# EAGLE board schema_puissance (EAGLE 6.5.0)
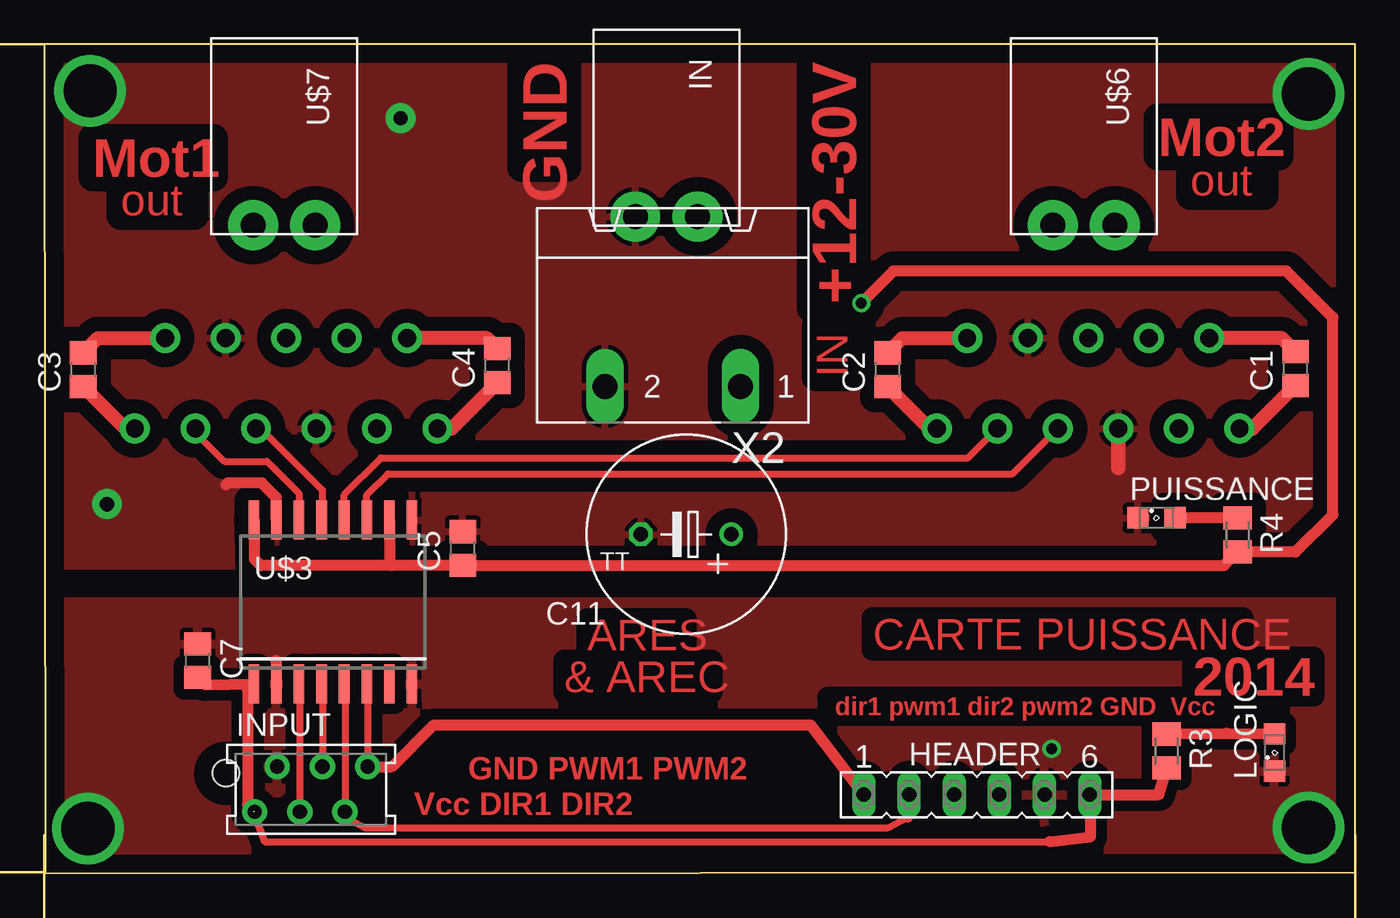
[diagram p0: board, top side]
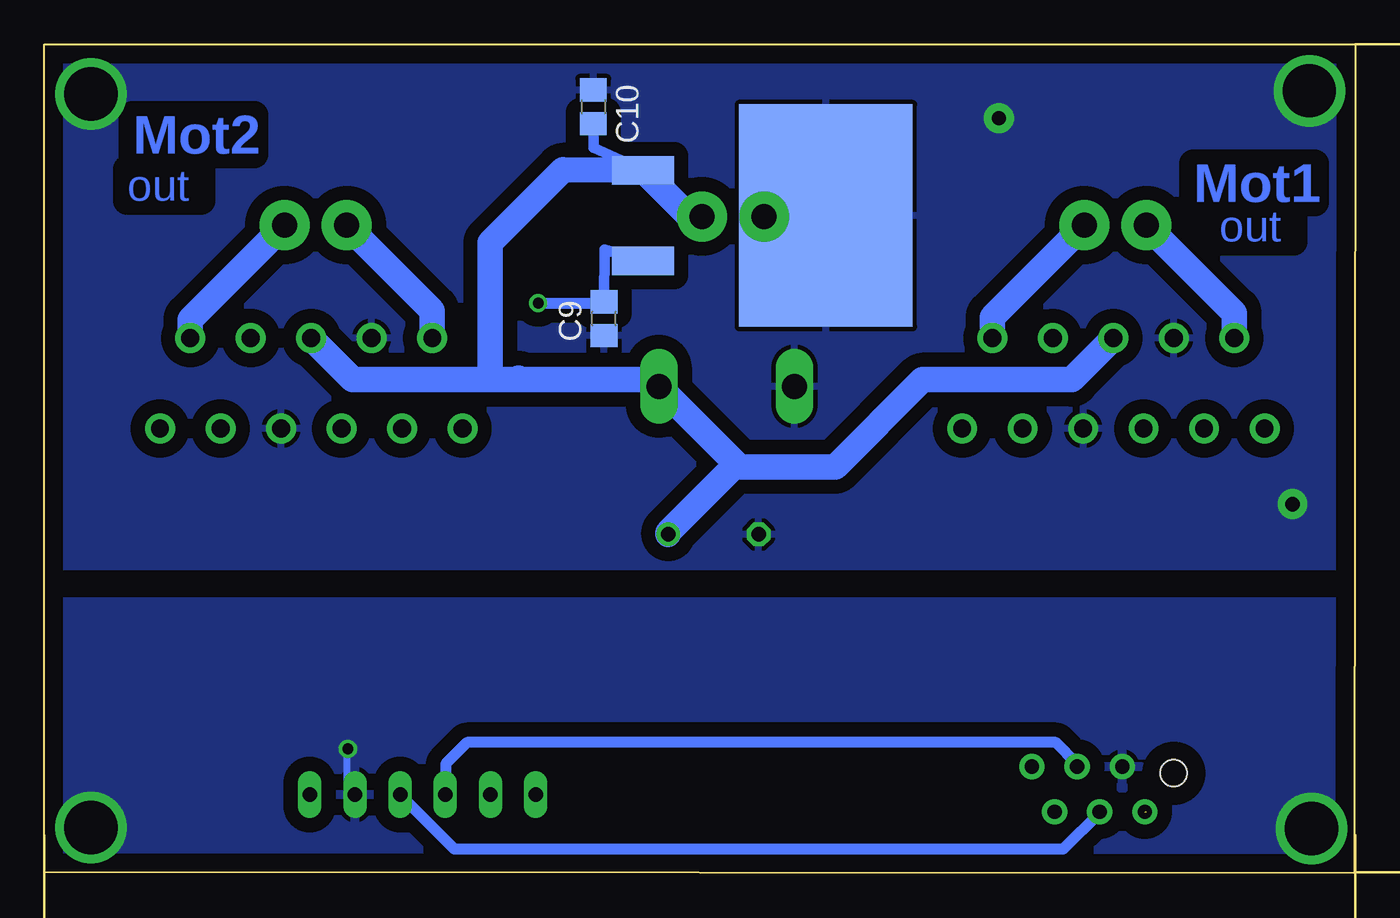
[diagram p1: board, bottom side, seen from below]

Size 73.66 x 46.58 mm. Coordinates in mm from the lower left corner, seen from the top.
Outline: 0,46.58 0.03,0 73.66,0.03 73.66,46.58 0,46.58
Copper layers (1*16): Top 0.035mm / dielectric 1.5mm / Bottom 0.035mm
Design rules "default": minimum track width 10mil, minimum drill 24mil, track to track 8mil, track to pad 8mil, pad to pad 8mil, via to via 8mil, smd to smd 8mil, copper to edge 40mil, drill to drill 8mil, minimum pad ring 10mil, minimum via ring 8mil, stop-mask expansion 4mil, vias tented up to drill 0mil, thermal gap 10mil
Milling: area 0,-5.6 to 1.5,-5; area 72.2,-5.6 to 73.7,-5; area 33.4,-4.9 to 40.3,-3.1; area -14.3,0 to -13.7,1.5; area -14.3,45.1 to -13.7,46.6; area -16.1,19.8 to -14.4,26.8; 6 lines

## Footprints (pad centres in the part's own frame; a part is rotated, then mirrored left to right if it is on the bottom)
C0805 = smd 1.3 x 1.5: 1 -0.95,0; 2 0.95,0
TT5D11 = drill 0.813: + -2.54,0 | drill 0.813 octagon: - 2.54,0
FE06 = drill 0.813 long: 1 -6.35,0; 2 -3.81,0; 3 -1.27,0; 4 1.27,0; 5 3.81,0; 6 6.35,0
SL-3.5-2-90G = drill 1.4 pad 2.8: 1 0,-1.75; 2 0,1.75
AMP-215079-6 = drill 0.8 pad 1.422: 1 0,0; 2 1.27,2.54; 3 2.54,0; 4 3.81,2.54; 5 5.08,0; 6 6.35,2.54 | hole 1.5: -1.62,2.175
SML0805 = smd 1.2 x 1.2: A 1.05,0; C -1.05,0
M0805 = smd 1.3 x 1.6: 1 -0.95,0; 2 0.95,0
LMD18200 = drill 1 pad 1.676: 1 0,0; 2 1.7,5.08; 3 3.4,0; 4 5.1,5.08; 5 6.8,0; 6 8.5,5.08; 7 10.2,0; 8 11.9,5.08; 9 13.6,0; 10 15.3,5.08; 11 17,0
SO-16W = smd 0.6 x 2.2: 1 -4.445,-4.6; 2 -3.175,-4.6; 3 -1.905,-4.6; 4 -0.635,-4.6; 5 0.635,-4.6; 6 1.905,-4.6; 7 3.175,-4.6; 8 4.445,-4.6; 9 4.445,4.6; 10 3.175,4.6; 11 1.905,4.6; 12 0.635,4.6; 13 -0.635,4.6; 14 -1.905,4.6; 15 -3.175,4.6; 16 -4.445,4.6
DPAK = smd 12.5 x 9.75: 1 0,0 | smd 1.6 x 3.5: 2 -2.54,-10.275; 3 2.54,-10.275
GMSTBA2 = drill 1.397 long: 1 -3.81,5.08; 2 3.81,5.08

## Placement (x,y rotation side)
C1  10nF  [C0805]  70.31,28.36 90 top
C2  10nF  [C0805]  47.39,28.3 90 top
C3  10nF  [C0805]  2.18,28.3 90 top
C4  10nF  [C0805]  25.46,28.53 90 top
C5  100nF  [C0805]  23.51,18.24 90 top
C7  100nF  [C0805]  8.61,11.94 270 top
C9  100nF  [C0805]  42.21,31.16 90 bottom
C10  330nF  [C0805]  42.81,43.07 270 bottom
C11  2200u  [TT5D11]  36.06,19.04 180 top
HEADER  [FE06]  52.4,4.4 0 top
IN  SL-3.5-2-90G  [SL-3.5-2-90G]  34.96,36.91 270 top
INPUT  MMATCH-6-  [AMP-215079-6]  11.81,3.44 0 top
LOGIC  [SML0805]  69.13,6.78 90 top
PUISSANCE  [SML0805]  62.5,19.97 0 top
R3  1k  [M0805]  63.08,6.86 270 top
R4  1k  [M0805]  67.06,19.01 270 top
U$1  LMD18200  [LMD18200]  5.08,24.99 0 top
U$2  LMD18200  [LMD18200]  50.16,24.99 0 top
U$3  ADUM1400S  [SO-16W]  16.21,15.24 0 top
U$5  L7805TO263  [DPAK]  29.74,36.97 270 bottom
U$6  SL-3.5-2-90G  [SL-3.5-2-90G]  58.42,36.42 270 top
U$7  SL-3.5-2-90G  [SL-3.5-2-90G]  13.47,36.42 270 top
X2  GMSTBA2  [GMSTBA2]  35.31,32.44 180 top

## Library data of the parts
C1-C5 C7 C9-C11 R3 R4 = rcl
HEADER = con-lsta; OC_FARNELL: unknown; OC_NEWARK: unknown
IN U$6 U$7 = WEIDMULLER
INPUT = jt-con-micromatch
LOGIC PUISSANCE = led
U$1 U$2 = texas
U$3 = analog-devices
U$5 = st-microelectronics
X2 = con-phoenix-762; MF: FARNELL; MPN: 1757242; OC_FARNELL: 3705171; OC_NEWARK: 71C4161

## Nets
+5V: C5.1 C9.2 R4.2 U$3.10 U$3.16 U$5.3
+12V: C10.2 C11.+ IN.2 U$1.6 U$2.6 U$5.2 X2.1
C_DIR1: HEADER.4 INPUT.3 U$3.3
C_DIR2: HEADER.2 INPUT.5 U$3.5
C_PWM1: HEADER.3 INPUT.4 U$3.4
C_PWM2: HEADER.1 INPUT.6 U$3.6
DIR1: U$1.3 U$3.14
DIR2: U$2.3 U$3.12
GND: C7.1 HEADER.5 INPUT.2 LOGIC.C U$3.2 U$3.8
GNDA: C5.2 C9.1 C10.1 C11.- IN.1 PUISSANCE.C U$1.4 U$1.7 U$2.4 U$2.7 U$3.9 U$3.15 U$5.1 X2.2
N$1: C1.1 U$2.11
N$2: PUISSANCE.A R4.1
N$3: C2.1 U$2.1
N$4: LOGIC.A R3.1
N$5: C3.1 U$1.1
N$7: C4.1 U$1.11
POLE_1_MOT1: C3.2 U$1.2 U$7.1
POLE_1_MOT2: C2.2 U$2.2 U$6.1
POLE_2_MOT1: C4.2 U$1.10 U$7.2
POLE_2_MOT2: C1.2 U$2.10 U$6.2
PWM1: U$1.5 U$3.13
PWM2: U$2.5 U$3.11
TF1: U$1.9
TF2: U$2.9
VCC: C7.2 HEADER.6 INPUT.1 R3.2 U$3.1

## Tracks (layer width: path | path; a pad name or v marks a point on that pad's centre or on a via)
+5V  (via drill 0.6 pad 1.02)
  Top 0.61: v45.91,32.04 47.71,33.84 69.81,33.84 72.41,31.24 72.41,20.14 70.31,18.04 67.08,18.04 R4.2 66.29,17.29 C5.1 19.51,17.29 | 19.51,17.29 12.16,17.29 11.81,17.64 11.81,19.8 U$3.16 | U$3.10 19.38,17.42 19.51,17.29
  Bottom 0.6: C9.2 42.18,35.04 U$5.3
  Bottom 0.61: v45.91,32.04 42.28,32.04 C9.2
+12V
  Bottom 0.6: C10.2 42.81,40.79 U$5.2
  Bottom 1.422: U$1.6 15.91,27.74 24.31,27.74 29.21,22.84 34.6,22.84 34.76,23 | U$2.6 56.33,27.74 48.51,27.74 | 48.51,27.74 47.11,27.74 | 47.11,27.74 39.5,27.74 X2.1 34.76,23 | C11.+ 38.6,19.15 34.76,23 | 47.01,27.84 47.11,27.74 | 48.51,27.74 48.61,27.84 48.61,35.44 44.52,39.54 U$5.2 37.49,36.98 arc-45 37.31,36.91 IN.2
C_DIR1
  Top 0.406: U$3.3 14.35,10.64 INPUT.3
  Bottom 0.61: INPUT.3 14.35,3.4 16.41,1.34 50.61,1.34 HEADER.4
C_DIR2
  Top 0.406: U$3.5 16.89,10.64 INPUT.5 | 16.89,3.16 18.01,2.55 47.41,2.55 48.51,3.14
  Top 0.61: INPUT.5 16.89,3.16 | 48.51,3.14 48.51,4.32 HEADER.2
C_PWM1
  Top 0.406: U$3.4 15.62,10.64 INPUT.4
  Bottom 0.61: INPUT.4 15.62,6.15 16.81,7.34 49.91,7.34 51.11,6.14 51.11,4.42 HEADER.3
C_PWM2
  Top 0.406: U$3.6 18.16,10.64 INPUT.6
  Top 0.61: INPUT.6 19.54,5.98 21.87,8.32 43.06,8.33 HEADER.1
DIR1
  Top 0.406: U$1.3 8.48,24.77 10.11,23.14 12.51,23.14 14.31,21.34 U$3.14
DIR2
  Top 0.406: U$3.12 16.84,21.28 18.91,23.34 51.91,23.34 U$2.3
GND  (via drill 0.6 pad 1.02, 3 pad 1.42)
  Top 0.61: 13.01,11.94 13.01,10.67 U$3.2
  Bottom 0.406: HEADER.5 56.65,4.4 56.65,6.81 | 56.65,6.98 56.69,6.98 56.69,6.81 56.65,6.81 | 56.65,6.81 56.65,6.98 | 56.65,6.98 56.65,7
  other vias: 56.61,6.98 71.05,2.57 2.44,2.51
  pour Bottom (isolate 0.813): 0.01,-0.06 0.11,15.24 73.61,15.24 73.51,-0.06
  pour Top (isolate 0.61): 0.11,15.24 -0.2,-0.29 73.61,-0.06 73.61,15.24
GNDA  (via drill 0.8 pad 1.68, 3 pad 1.42)
  Top 0.61: U$3.15 13.04,21.12 12.21,21.94 10.31,21.94 10.21,21.84
  Top 0.813: U$2.7 60.36,22.78
  other vias: 3.51,20.74 20.01,42.44 2.57,43.98 71.05,43.8
  pour Bottom (isolate 0.8): 0.11,17.24 0.11,46.24 73.61,46.51 73.61,17.24
  pour Top (isolate 0.8): 0.11,17.24 0.11,46.24 73.61,46.24 73.61,17.24
N$1
  Top 0.8: C1.1 67.89,24.99 U$2.11
N$2
  Top 0.61: R4.1 PUISSANCE.A
N$3
  Top 0.8: C2.1 49.74,24.99 U$2.1
N$4
  Top 0.61: R3.1 66.43,7.87 LOGIC.A
N$5
  Top 0.8: C3.1 4.54,24.99 U$1.1
N$7
  Top 0.8: C4.1 22.87,24.99 U$1.11
POLE_1_MOT1
  Top 0.8: C3.2 3,30.07 U$1.2
  Bottom 1.422: U$7.1 6.78,31.48 U$1.2
POLE_1_MOT2
  Top 0.8: C2.2 48.21,30.07 U$2.2
  Bottom 1.422: U$6.1 51.87,31.62 U$2.2
POLE_2_MOT1
  Top 0.8: C4.2 24.87,30.07 U$1.10
  Bottom 1.422: U$7.2 20.38,31.26 U$1.10
POLE_2_MOT2
  Top 0.8: C1.2 69.55,30.07 U$2.10
  Bottom 1.422: U$6.2 65.47,31.13 U$2.10
PWM1
  Top 0.406: U$1.5 12.16,24.99 15.61,21.54 15.61,19.88 U$3.13
PWM2
  Top 0.406: U$3.11 18.11,21.25 19.31,22.44 54.41,22.44 U$2.5
VCC  (1 unrouted)
  Top 0.406: 11.73,3.43 12.39,1.76 56.49,1.76
  Top 0.61: C7.2 9.02,10.59 U$3.1 11.41,10.29 11.41,3.84 INPUT.1 | 56.49,1.76 58.81,2.04 58.81,4.34 HEADER.6 62.64,4.4 R3.2

## Text on the board
Top: GND | +12-30V | Mot2 | Mot1 | out | out | IN | ARES | CARTE PUISSANCE | & AREC | 2014 | dir1 pwm1 dir2 pwm2 GND Vcc | GND PWM1 PWM2 / Vcc DIR1 DIR2
Bottom: Mot2 | out | Mot1 | out